# Altium PCB AP.PcbDoc (part 1 of 3)
Units mm, origin at the board's own origin, x right, y up, seen from the top; angles counter-clockwise.
Board outline 75.1 x 75.1 mm, 2 copper layers (Top Layer, Bottom Layer); 135 components, 138 nets, 746 pads, 286 vias.
Unrouted connection lines stored in the file: 9.
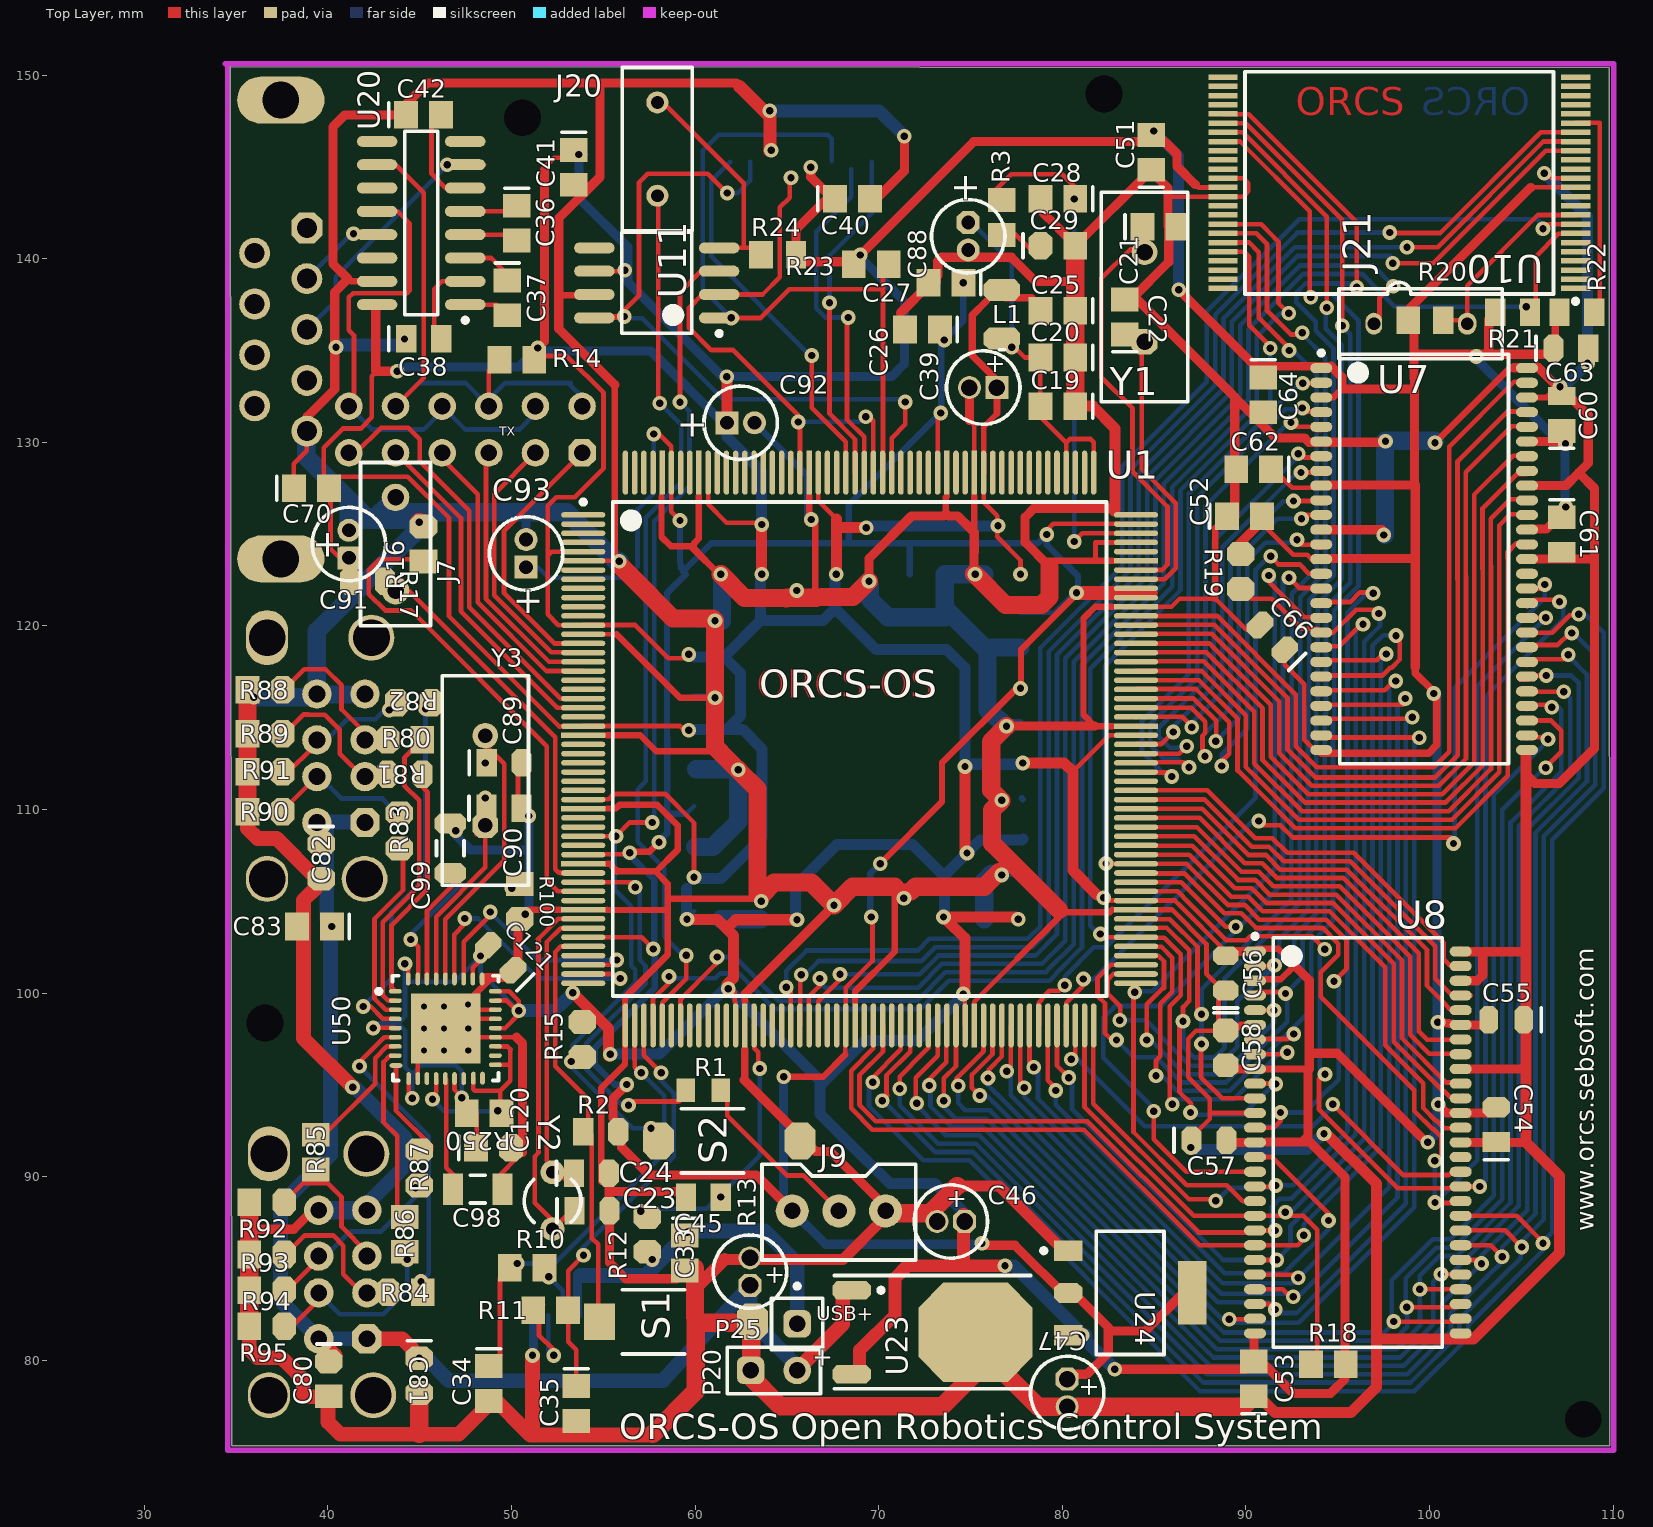
[diagram p0: Top Layer view]
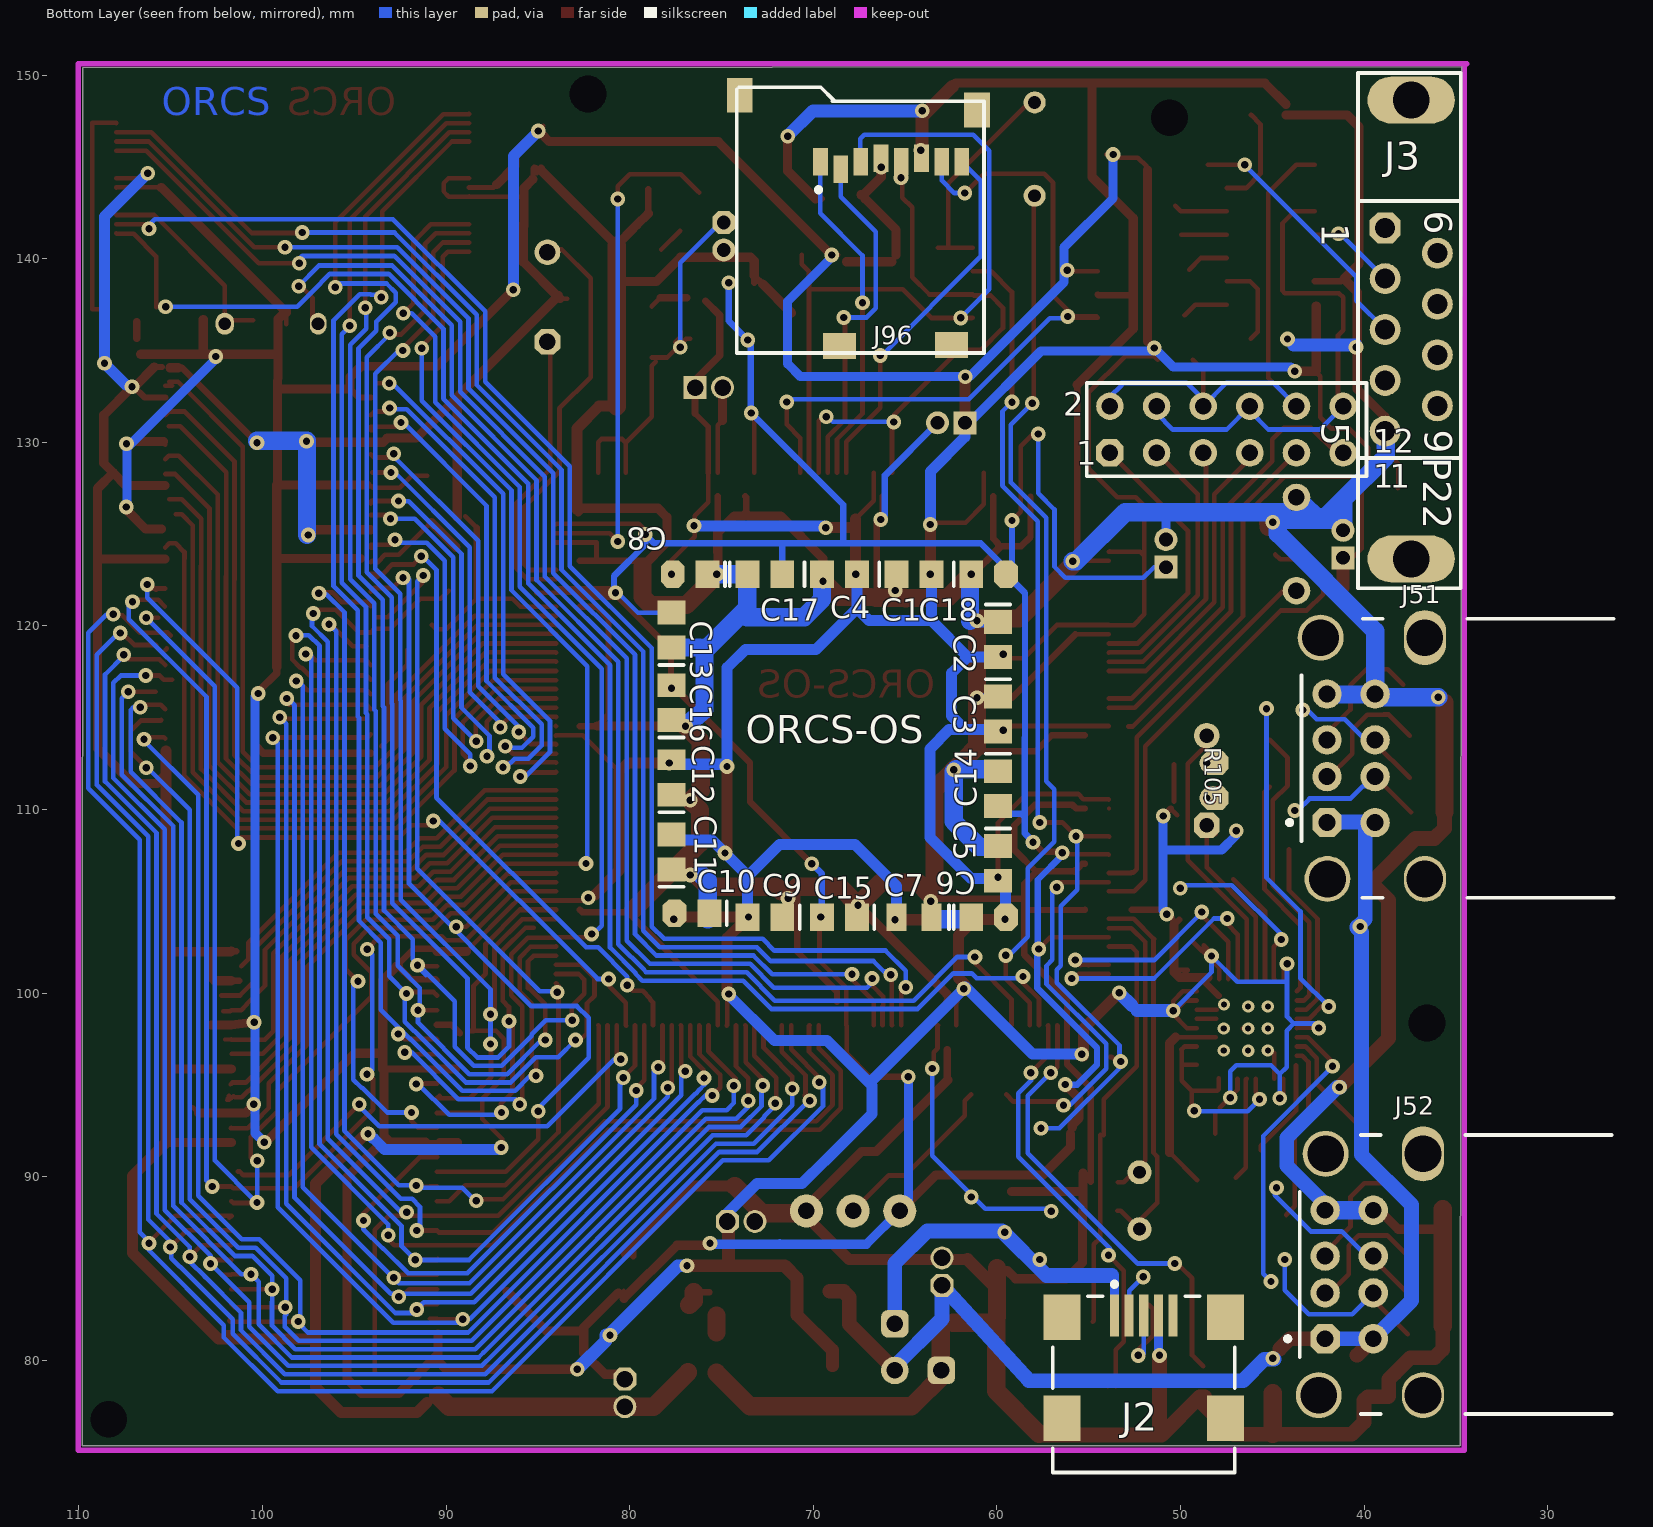
[diagram p1: Bottom Layer view, seen from below]

## Layer stack, top to bottom
Top Layer: signal copper 0.0356
Dielectric: core 0.32, FR-4, Dk 4.8
Bottom Layer: signal copper 0.0356

## Board outline
34.775,75.35 109.8,75.35 109.775,150.4 34.7,150.45

## Design rules (kind name [scope] priority, off if disabled: settings)
Clearance [All] p1: gap=0.2
FabricationTestPointUsage TestPointUsage [All] p1: valid=0 allowmultiple=FALSE
FabricationTestpoint Testpoint [All] p1: side=3 testpointundercomponent=TRUE minsize=1.016 maxsize=2.54 preferedsize=1.524 minholesize=0 maxholesize=1.016 preferedholesize=0.813 testpointgrid=0.025 allowsidetop=TRUE allowsidebottom=TRUE usegrid=TRUE gridtolerance=0
PolygonConnect [All] p1: connectstyle=Relief reliefconductorwidth=0.254 reliefentries=4 polygonreliefangle="90 Angle"
RoomDefinition AP [InComponentClass('AP')] p1: confinementstyle=ConfineIn formatcopy=TRUE lockcomponents=FALSE outline 117.802,66.795 148.79,66.795 148.79,98.037 117.802,98.037
RoutingVias [All] p1: holewidth=0.4 width=0.8 viastyle="Through Hole" minholewidth=0.4 minwidth=0.8 maxholewidth=0.4 maxwidth=0.8
SilkscreenOverComponentPads [All] p1: minsilkscreentomaskgap=0.254
SolderMaskExpansion [All] p1: expansion=0.102
Width Width_1V8 [InNet('1V8')] p1: maxlimit=0.5 minlimit=0.254 preferedwidth=0.35
Width Width_3V3 [InNet('3V3')] p2: maxlimit=0.7 minlimit=0.254 preferedwidth=0.5
Width Width_USB5V [InNet('USB5V')] p3: maxlimit=0.8 minlimit=0.254 preferedwidth=0.5
Width Width_5V [InNet('5V')] p4: maxlimit=0.8 minlimit=0.254 preferedwidth=0.5
Width Width_GND [InNet('GND')] p5: maxlimit=1 minlimit=0.25 preferedwidth=0.35
Width [All] p6: maxlimit=0.254 minlimit=0.254 preferedwidth=0.254
25 further rules are at their usual default settings.

## Components (designator, comment, footprint, x,y, rotation, side; value= is the part's Value field where it differs from the comment)
C1 "Cap" C0805#1 64.516,122.821 r180 bottom
C2 "Cap" C0805#1 59.944,119.265 r270 bottom
C3 "Cap" C0805#1 59.944,115.201 r270 bottom
C4 "Cap" C0805#1 68.58,122.821 r180 bottom
C5 "Cap" C0805#1 59.944,107.073 r270 bottom
C6 "Cap" C0805#2 60.452,104.14 r180 bottom
C7 "Cap" C0805#3 64.516,104.14 r0 bottom
C8 "Cap" C0805#2 76.708,122.821 r0 bottom
C9 "Cap" C0805#1 72.644,104.14 r0 bottom
C10 "Cap" C0805#2 76.608,104.365 r0 bottom
C11 "Cap" C0805#1 77.724,107.696 r90 bottom
C12 "Cap" C0805#4 77.724,111.76 r90 bottom
C13 "Cap" C0805#1 77.724,119.773 r90 bottom
C14 "Cap" C0805#1 59.944,111.137 r270 bottom
C15 "Cap" C0805#1 68.58,104.14 r0 bottom
C16 "Cap" C0805#1 77.724,115.824 r90 bottom
C17 "Cap" C0805#1 72.644,122.821 r180 bottom
C18 "Cap" C0805#2 60.452,122.821 r180 bottom
C19 "Cap" C0805#1 79.756,131.965 r180 top
C20 "Cap" C0805#1 79.756,134.62 r180 top
C21 "Cap" C0805#1 85.311,141.732 r0 top
C22 "Cap" C0805#1 83.412,136.827 r90 top
C23 "Cap" C0805#5 54.383,88.159 r0 top
C24 "Cap" C0805#5 54.356,90.191 r0 top
C25 "Cap" C0805#1 79.756,137.16 r180 top
C26 "Cap" C0805#1 72.386,136.144 r180 top
C27 "Cap" C0805#1 73.66,138.684 r180 top
C28 "Cap" C0805#1 79.756,143.256 r180 top
C29 "Cap" C0805#6 79.756,140.716 r0 top
C33 "Cap" C0805#1 59.436,85.852 r270 top
C34 "Cap" C0805#1 48.768,78.74 r270 top
C35 "Cap" C0805#1 53.528,77.649 r270 top
C36 "Cap" C0805#1 50.292,141.931 r270 top
C37 "Cap" C0805#1 49.784,137.867 r270 top
C38 "Cap" C0805#3 45.225,135.636 r0 top
C39 "Cap Pol1" A#1 75.692,132.981 r180 top
C40 "Cap" C0805#1 68.58,143.256 r0 top
C41 "Cap" C0805#1 53.39,144.979 r270 top
C42 "Cap" C0805#1 45.212,147.828 r0 top
C45 "Cap Pol1" A#2 62.992,84.836 r90 top
C46 "Cap Pol1" A#2 73.93,87.567 r180 top
C47 "Cap Pol1" A#2 80.264,78.232 r270 top
C51 "Cap" C0805#1 84.836,145.796 r90 top
C52 "Cap" C0805#1 89.916,125.984 r0 top
C53 "Cap" C0805#1 90.424,78.998 r90 top
C54 "Cap" C0805#5 103.632,92.839 r90 top
C55 "Cap" C0805#7 104.178,98.552 r180 top
C56 "Cap" C0805#8 88.9,101.092 r90 top
C57 "Cap" C0805#9 87.984,91.998 r0 top
C58 "Cap" C0805#10 88.9,97.028 r270 top
C60 "Cap" C0805#11 107.188,131.572 r90 top
C61 "Cap" C0805#4 107.188,124.968 r270 top
C62 "Cap" C0805#1 90.424,128.524 r180 top
C63 "Cap" C0805#12 107.696,135.128 r0 top
C64 "Cap" C0805#1 90.932,132.588 r270 top
C66 "Cap" C0805#9 91.44,119.38 r135 top
C70 "Cap" C0805#1 39.116,127.508 r0 top
C80 "Cap" C0805#6 40.041,78.998 r270 top
C81 "Cap" C0805#13 44.979,79.173 r270 top
C82 "Cap" C0805#13 39.649,107.18 r270 top
C83 "Cap" C0805#1 39.274,103.632 r180 top
C88 "Cap Pol1" A#3 74.876,141.224 r270 top
C89 "Cap" C0805#5 49.602,112.55 r0 top
C90 "Cap" C0805#3 49.593,110.06 r0 top
C91 "Cap Pol1" A#4 41.148,124.46 r90 top
C92 "Cap Pol1" A#4 62.484,131.064 r0 top
C93 "Cap Pol1" A#4 50.8,123.952 r90 top
C98 "Cap" CAPC3216L#1 48.167,89.329 r0 top
C99 "Cap" CAPC3216L#2 46.67,107.888 r90 top
C120 "Cap" C0805#2 49.026,91.572 r0 top
C121 "Cap" C0805#9 49.416,101.932 r135 top
J2 "440119-2" 440247 52.004,74.601 r270 bottom
J3 "D Connector 9" DSUB1.385-2H9 27.94,136.144 r270 bottom
J7 "Jumper" RAD-0.2#1 43.688,124.46 r90 top
J9 "SW-SPDT" TL36WW15050 70.374,88.142 r0 top
J20 "Jumper" RAD-0.2#2 57.946,145.971 r90 top
J21 "Jumper" RAD-0.2#3 99.51,136.46 r0 top
J51 "1-1470168-1" 1470168#1 26.416,112.793 r180 bottom
J52 "1-1470168-1" 1470168#2 26.516,84.68 r180 bottom
J96 "SDAMB-01201BT00_MINISD" SDAMB-012_miniSD 62.61,138.801 r180 bottom
L1 "Inductor" 0402-A 76.708,136.144 r90 top
P20 "Header 2" HDR1X2 63.021,79.456 r0 top
P22 "Header 6X2" HDR2X6 53.848,129.425 r180 bottom
P25 "Plug" PIN1 65.561,81.996 r0 top
R1 "Res2" 2012[0805]#1 60.452,94.713 r180 top
R2 "Res2" 2012[0805]#2 54.864,92.456 r0 top
R3 "Res" 2012[0805]#3 76.708,142.24 r270 top
R10 "Res" 2012[0805]#3 50.86,85.061 r0 top
R11 "Res" 2012[0805]#3 52.137,82.729 r180 top
R12 "Res" 2012[0805]#4 57.404,86.868 r270 top
R13 "Res" 2012[0805]#5 60.452,88.9 r180 top
R14 "Res" 2012[0805]#3 50.292,134.505 r0 top
R15 "Res" 2012[0805]#4 53.848,97.478 r270 top
R16 "Res" 2012[0805]#6 45.212,124.46 r270 top
R17 "Res" 2012[0805]#7 42.164,122.428 r0 top
R18 "Res" 2012[0805]#3 94.488,79.781 r180 top
R19 "Res" 2012[0805]#4 89.708,122.961 r270 top
R20 "Res" 2012[0805]#8 99.793,136.652 r180 top
R21 "Res" 2012[0805]#5 104.523,137.085 r180 top
R22 "Res" 2012[0805]#5 108.021,137.085 r0 top
R23 "Res" 2012[0805]#3 69.596,139.7 r180 top
R24 "Res" 2012[0805]#8 64.543,140.208 r180 top
R80 "Res" 2012[0805]#9 44.196,113.792 r180 top
R81 "Res" 2012[0805]#7 44.196,111.927 r180 top
R82 "Res" 2012[0805]#4 44.704,115.824 r180 top
R83 "Res" 2012[0805]#4 43.896,108.837 r90 top
R84 "Res" 2012[0805]#9 44.221,83.72 r180 top
R85 "Res" 2012[0805]#3 39.349,91.34 r270 top
R86 "Res" 2012[0805]#3 44.196,86.868 r270 top
R87 "Res" 2012[0805]#4 44.987,90.474 r270 top
R88 "Res" 2012[0805]#6 36.576,116.532 r180 top
R89 "Res" 2012[0805]#9 36.576,114.134 r0 top
R90 "Res" 2012[0805]#6 36.576,109.887 r180 top
R91 "Res" 2012[0805]#6 36.576,112.052 r180 top
R92 "Res" 2012[0805]#6 36.676,88.619 r180 top
R93 "Res" 2012[0805]#6 36.676,85.771 r180 top
R94 "Res" 2012[0805]#9 36.676,83.814 r0 top
R95 "Res" 2012[0805]#9 36.676,81.874 r0 top
R100 "Res" 2012[0805]#9 50.442,104.987 r270 top
R105 "Res" 2012[0805]#4 48.135,111.585 r90 bottom
R250 "Res" 2012[0805]#3 48.518,93.472 r180 top
S1 "KSS221GLFS" KSS-2G#1 57.741,82.106 r0 top
S2 "KSS221GLFS" KSS-2G#2 60.96,91.957 r180 top
U1 "AT91SAM9260-CI-002" QFP208_M 68.961,113.296 r0 top
U7 "MT48LC16M16A2P-75" TSOP2-54_L 93.86,117.8 r0 top
U8 "MT48LC16M16A2P-75" TSOP2-54_L 90.254,86.034 r0 top
U10 "M29F400B90N1R" TSOP48 98.353,144.131 r90 top
U11 "AT45" SO8W_N 57.912,138.684 r180 top
U20 "MAX3232ESE" NSO16_N 45.085,141.943 r180 top
U23 "LF33CDT" TO-252 71.898,81.538 r270 top
U24 "REG1117-1.8" ZZ311 83.69,83.678 r270 top
U50 "USB2514" QFN36_L 46.125,98.35 r0 top
Y1 "18.432Mhz" HC-49U#1 84.478,137.911 r90 top
Y2 "32.768kHz" R38 52.241,88.7 r0 top
Y3 "24Mhz" HC-49U#2 48.577,111.584 r90 top

## Footprints (in the part's own frame and the unit in brackets; to place one, negate y for a bottom-side part, rotate by r counter-clockwise, add the part's x,y. Pads: shape width x height; smd on the part's side, far side on the other; paste and mask are expansions set on the pad)
0402-A [mm] "Chip Inductor; Body 1 x 0.5 mm (LxW typ)"
  oct 1.2x2 smd: 1(-0.5,0) 2(2.156,0)
  silkscreen extent -1.1,-0.15 -1.1,0.15
2012[0805]#1 [mm] "Chip Resistor; Body 2.0 x 1.3 mm (LxW typ)"
  rect 1x1.3 smd: 1(-0.95,0) 2(0.95,0)
2012[0805]#2 [mm] "Chip Resistor; Body 2.0 x 1.3 mm (LxW typ)"
  rect 1.1x1.5 smd: 1(-0.95,0)
  oct 1.1x1.5 smd: 2(0.95,0)
2012[0805]#3 [mm] "Chip Resistor; Body 2.0 x 1.3 mm (LxW typ)"
  rect 1.3x1.5 smd: 1(-0.95,0) 2(0.95,0)
2012[0805]#4 [mm] "Chip Resistor; Body 2.0 x 1.3 mm (LxW typ)"
  oct 1.3x1.5 smd: 1(-0.95,0) 2(0.95,0)
2012[0805]#5 [mm] "Chip Resistor; Body 2.0 x 1.3 mm (LxW typ)"
  rect 1.1x1.5 smd: 1(-0.95,0) 2(0.95,0)
2012[0805]#6 [mm] "Chip Resistor; Body 2.0 x 1.3 mm (LxW typ)"
  oct 1.3x1.5 smd: 1(-0.95,0)
  rect 1.3x1.5 smd: 2(0.95,0)
2012[0805]#7 [mm] "Chip Resistor; Body 2.0 x 1.3 mm (LxW typ)"
  oct 1.1x1.5 smd: 1(-0.95,0) 2(0.95,0)
2012[0805]#8 [mm] "Chip Resistor; Body 2.0 x 1.3 mm (LxW typ)"
  rect 1.1x1.5 smd: 1(-0.95,0)
  rect 1.3x1.5 smd: 2(0.95,0)
2012[0805]#9 [mm] "Chip Resistor; Body 2.0 x 1.3 mm (LxW typ)"
  rect 1.3x1.5 smd: 1(-0.95,0)
  oct 1.3x1.5 smd: 2(0.95,0)
440247 [mm] "Connector; USB2.0, Type B, SM; 5 Position; Right Angle"
  rect 2.3x0.5 smd: 1(-7.85,-1.6) 2(-7.85,-0.8) 3(-7.85,0) 4(-7.85,0.8) 5(-7.85,1.6)
  rect 2.5x2 smd: 6(-7.75,4.45) 7(-2.25,4.45) 8(-7.75,-4.45) 9(-2.25,-4.45)
  round 0 all layers, no hole: MH1(-5.25,2.2) MH2(-5.25,-2.2)
  silkscreen extent -9.67,-4.95 0.7,4.95
1470168#1 [mm] "Connector; USB1.1, Type A, Thru-Hole; 4x4 Position; Right Angle"
  oct 1.6x1.6 hole 0.92: 1(-15.61,-3.5)
  round 1.6 hole 0.92: 2(-15.61,-1) 3(-15.61,1) 4(-15.61,3.5) 5(-12.99,-3.5) 6(-12.99,-1) 7(-12.99,1) 8(-12.99,3.5)
  oval 2.3x3 hole 2: 9(-10.28,6.57)
  oval 2.3x2.5 hole 2: 10(-10.28,-6.57)
  round 2.5 hole 2: 11(-15.96,6.57) 12(-15.584,-6.57)
  silkscreen extent -17.78,-7.6 0,7.6
1470168#2 [mm] "Connector; USB1.1, Type A, Thru-Hole; 4x4 Position; Right Angle"
  oct 1.6x1.6 hole 0.92: 1(-15.61,-3.5)
  round 1.6 hole 0.92: 2(-15.61,-1) 3(-15.61,1) 4(-15.61,3.5) 5(-12.99,-3.5) 6(-12.99,-1) 7(-12.99,1) 8(-12.99,3.5)
  oval 2.3x3 hole 2: 9(-10.28,6.57)
  oval 2.3x2.5 hole 2: 10(-10.28,-6.57)
  round 2.5 hole 2: 11(-15.584,6.57) 12(-15.96,-6.57)
  silkscreen extent -17.78,-7.6 0,7.6
A#1 [mm] "Capacitor, Electrolytic, Radial; Body 4 x 5 mm (Dia.xH typ); Pin Spacing 1.5 mm (typ)"
  rect 1.25x1.25 hole 0.9: 1(-0.75,0)
  round 1.25 hole 0.9: 2(0.75,0)
  silkscreen extent -2,-2 2,2
A#2 [mm] "Capacitor, Electrolytic, Radial; Body 4 x 5 mm (Dia.xH typ); Pin Spacing 1.5 mm (typ)"
  oct 1.25x1.25 hole 0.9: 1(-0.75,0)
  round 1.25 hole 0.9: 2(0.75,0)
  silkscreen extent -2,-2 2,2
A#3 [mm] "Capacitor, Electrolytic, Radial; Body 4 x 5 mm (Dia.xH typ); Pin Spacing 1.5 mm (typ)"
  oct 1.25x1.25 hole 0.75: 1(-0.75,0)
  round 1.25 hole 0.75: 2(0.75,0)
  silkscreen extent -2,-2 2,2
A#4 [mm] "Capacitor, Electrolytic, Radial; Body 4 x 5 mm (Dia.xH typ); Pin Spacing 1.5 mm (typ)"
  rect 1.25x1.25 hole 0.75: 1(-0.75,0)
  round 1.25 hole 0.75: 2(0.75,0)
  silkscreen extent -2,-2 2,2
C0805#1 [mm] "Chip Capacitor; Body 2.0 x 1.2 mm (LxW typ)"
  rect 1.3x1.5 smd: 1(-0.95,0) 2(0.95,0)
  silkscreen extent -1.9,-0.65 -1.9,0.65
C0805#2 [mm] "Chip Capacitor; Body 2.0 x 1.2 mm (LxW typ)"
  rect 1.3x1.5 smd: 1(-0.95,0)
  oct 1.3x1.5 smd: 2(0.95,0)
  silkscreen extent -1.9,-0.65 -1.9,0.65
C0805#3 [mm] "Chip Capacitor; Body 2.0 x 1.2 mm (LxW typ)"
  rect 1.1x1.5 smd: 1(-0.95,0) 2(0.95,0)
  silkscreen extent -1.9,-0.65 -1.9,0.65
C0805#4 [mm] "Chip Capacitor; Body 2.0 x 1.2 mm (LxW typ)"
  rect 1.3x1.5 smd: 1(-0.95,0)
  rect 1.1x1.5 smd: 2(0.95,0)
  silkscreen extent -1.9,-0.65 -1.9,0.65
C0805#5 [mm] "Chip Capacitor; Body 2.0 x 1.2 mm (LxW typ)"
  rect 1.1x1.5 smd: 1(-0.95,0)
  oct 1.1x1.5 smd: 2(0.95,0)
  silkscreen extent -1.9,-0.65 -1.9,0.65
C0805#6 [mm] "Chip Capacitor; Body 2.0 x 1.2 mm (LxW typ)"
  oct 1.3x1.5 smd: 1(-0.95,0)
  rect 1.3x1.5 smd: 2(0.95,0)
  silkscreen extent -1.9,-0.65 -1.9,0.65
C0805#7 [mm] "Chip Capacitor; Body 2.0 x 1.2 mm (LxW typ)"
  oct 1x1.5 smd: 1(-0.95,0) 2(0.95,0)
  silkscreen extent -1.9,-0.65 -1.9,0.65
C0805#8 [mm] "Chip Capacitor; Body 2.0 x 1.2 mm (LxW typ)"
  oct 1.1x1.4 smd: 1(-0.95,0)
  oct 1x1.4 smd: 2(0.95,0)
  silkscreen extent -1.9,-0.65 -1.9,0.65
C0805#9 [mm] "Chip Capacitor; Body 2.0 x 1.2 mm (LxW typ)"
  oct 1.1x1.5 smd: 1(-0.95,0) 2(0.95,0)
  silkscreen extent -1.9,-0.65 -1.9,0.65
C0805#10 [mm] "Chip Capacitor; Body 2.0 x 1.2 mm (LxW typ)"
  oct 1.3x1.4 smd: 1(-0.95,0) 2(0.95,0)
  silkscreen extent -1.9,-0.65 -1.9,0.65
C0805#11 [mm] "Chip Capacitor; Body 2.0 x 1.2 mm (LxW typ)"
  rect 1.3x1.5 smd: 1(-0.95,0)
  rect 1x1.5 smd: 2(0.95,0)
  silkscreen extent -1.9,-0.65 -1.9,0.65
C0805#12 [mm] "Chip Capacitor; Body 2.0 x 1.2 mm (LxW typ)"
  oct 1.1x1.5 smd: 1(-0.95,0)
  rect 1.1x1.5 smd: 2(0.95,0)
  silkscreen extent -1.9,-0.65 -1.9,0.65
C0805#13 [mm] "Chip Capacitor; Body 2.0 x 1.2 mm (LxW typ)"
  oct 1.3x1.5 smd: 1(-0.95,0) 2(0.95,0)
  silkscreen extent -1.9,-0.65 -1.9,0.65
CAPC3216L#1 [mm] "Chip Capacitor, Body 3.2x1.6mm, IPC High Density"
  rect 1.1x1.7 smd: 1(-1.35,0) 2(1.35,0)
  silkscreen extent -0.4,-0.75 0.4,0.75, body extent -1.7,-0.9 1.7,0.9, height 1.3
CAPC3216L#2 [mm] "Chip Capacitor, Body 3.2x1.6mm, IPC High Density"
  oct 1.1x1.7 smd: 1(-1.35,0) 2(1.35,0)
  silkscreen extent -0.4,-0.75 0.4,0.75, body extent -1.7,-0.9 1.7,0.9, height 1.3
DSUB1.385-2H9 [mm] "Connector; D Subminiature; 9 Position; Right Angle; Pitch 1.385 mm"
  oct 1.69x1.69 hole 1.09: 1(-5.54,-10.92)
  round 1.69 hole 1.09: 2(-2.77,-10.92) 3(0,-10.92) 4(2.77,-10.92) 5(5.54,-10.92) 6(-4.155,-8.08) 7(-1.385,-8.08) 8(1.385,-8.08) 9(4.155,-8.08)
  oval 2.55x4.76 hole 2: 10(-12.495,-9.5) 11(12.495,-9.5)
  silkscreen extent -13.97,-12.4 14.1,-6.81
HC-49U#1 [mm] "Quartz Crystal, Thru-Hole; 2 Leads; Body 11.35 x 4.65 x 13.46 mm (LxWxH max)"
  oct 1.4x1.4 hole 0.9: 1(-2.44,0)
  round 1.4 hole 0.9: 2(2.44,0)
  silkscreen extent -5.7,-2.35 5.7,2.35
HC-49U#2 [mm] "Quartz Crystal, Thru-Hole; 2 Leads; Body 11.35 x 4.65 x 13.46 mm (LxWxH max)"
  oct 1.4x1.4 hole 0.8: 1(-2.44,0)
  round 1.4 hole 0.8: 2(2.44,0)
  silkscreen extent -5.7,-2.35 5.7,2.35
HDR1X2 [mm] "Connector; Header; 2 Position"
  rrect50% 1.5x1.5 hole 0.9: 1(0,0)
  round 1.5 hole 0.9: 2(2.54,0)
  silkscreen extent -1.27,-1.27 3.81,1.27
HDR2X6 [mm] "Connector; Header; 6x2 Position"
  oct 1.5x1.5 hole 0.9: 1(0,0)
  round 1.5 hole 0.9: 2(0,2.54) 3(2.54,0) 4(2.54,2.54) 5(5.08,0) 6(5.08,2.54) 7(7.62,0) 8(7.62,2.54) 9(10.16,0) 10(10.16,2.54) 11(12.7,0) 12(12.7,2.54)
  silkscreen extent -1.27,-1.27 13.97,3.81
KSS-2G#1 [mm] "Switch, Side Tact, SM; 2 Leads; Body 7x3.5mm (LxW)"
  oct 1.7x2 smd: 1(5.384,0)
  rect 1.7x2 smd: 2(-2.95,0)
  silkscreen extent -1.7,-1.75 1.7,1.75, body extent -2.75,-2.65 2.75,1.75, height 1.75
KSS-2G#2 [mm] "Switch, Side Tact, SM; 2 Leads; Body 7x3.5mm (LxW)"
  oct 1.7x2 smd: 1(2.95,0) 2(-4.752,0)
  silkscreen extent -1.7,-1.75 1.7,1.75, body extent -2.75,-2.65 2.75,1.75, height 1.75
NSO16_N [mm] "SOIC, 16-Leads, Body 9.9x3.9mm, Pitch 1.27mm, IPC Medium Density"
  oval 2.2x0.6 smd: 1(-2.4,4.445) 2(-2.4,3.175) 3(-2.4,1.905) 4(-2.4,0.635) 5(-2.4,-0.635) 6(-2.4,-1.905) 7(-2.4,-3.175) 8(-2.4,-4.445) 9(2.4,-4.445) 10(2.4,-3.175) 11(2.4,-1.905) 12(2.4,-0.635) 13(2.4,0.635) 14(2.4,1.905) 15(2.4,3.175) 16(2.4,4.445)
  silkscreen extent -2.53,-5 0.9,5.42, body extent -1.95,-4.95 1.95,4.95, height 1.75
PIN1 [mm] "Connector; Plug"
  rrect50% 1.5x1.5 hole 0.9: 1(0,0)
  silkscreen extent -1.4,-1.4 1.4,2.17
QFN36_L [mm] "QFN, 36-Leads, Body 6x6mm, Pitch 0.5mm, IPC High Density"
  oval 0.7x0.25 smd: 1(-2.45,1.75) 2(-2.45,1.25) 3(-2.45,0.75) 4(-2.45,0.25) 5(-2.45,-0.25) 6(-2.45,-0.75) 7(-2.45,-1.25) 8(-2.45,-1.75) 9(-2.413,-2.286) 19(3,-2.25) 20(3,-1.75) 21(3,-1.25) 22(3,-0.75) 23(3,-0.25) 24(3,0.25) 25(3,0.75) 26(3,1.25) 27(3,1.75)
  oval 0.25x0.7 smd: 10(-1.725,-3) 11(-1.225,-3) 12(-0.725,-3) 13(-0.225,-3) 14(0.275,-3) 15(0.775,-3) 16(1.275,-3) 17(1.8,-2.975) 18(2.3,-2.975) 28(2.275,2.425) 29(1.775,2.425) 30(1.275,2.425) 31(0.775,2.425) 32(0.275,2.425) 33(-0.225,2.425) 34(-0.725,2.425) 35(-1.225,2.425) 36(-1.75,2.425)
  rect 3.8x3.8 smd: 33(0.3,-0.275)
  silkscreen extent -3.47,-3.1 3.17,2.6, body extent -2.6,-3.09 3.12,2.59, height 0.8
QFP208_M [mm] "Shrink QFP, 208-Leads, Body 28x28mm, Pitch 0.5mm, IPC Low Density"
  oval 2.4x0.3 smd: 1(-15.05,12.75) 2(-15.05,12.25) 3(-15.05,11.75) 4(-15.05,11.25) 5(-15.05,10.75) 6(-15.05,10.25) 7(-15.05,9.75) 8(-15.05,9.25) 9(-15.05,8.75) 10(-15.05,8.25) 11(-15.05,7.75) 12(-15.05,7.25) 13(-15.05,6.75) 14(-15.05,6.25) 15(-15.05,5.75) 16(-15.05,5.25) 17(-15.05,4.75) 18(-15.05,4.25) 19(-15.05,3.75) 20(-15.05,3.25) 21(-15.05,2.75) 22(-15.05,2.25) 23(-15.05,1.75) 24(-15.05,1.25) 26(-15.05,0.25) 27(-15.05,-0.25) 28(-15.05,-0.75) 29(-15.05,-1.25) 30(-15.05,-1.75) 31(-15.05,-2.25) 32(-15.05,-2.75) 34(-15.05,-3.75) 35(-15.05,-4.25) 36(-15.05,-4.75) 37(-15.05,-5.25) 38(-15.05,-5.75) 40(-15.05,-6.75) 41(-15.05,-7.25) 42(-15.05,-7.75) 43(-15.05,-8.25) 45(-15.05,-9.25) 46(-15.05,-9.75) 47(-15.05,-10.25) 48(-15.05,-10.75) 49(-15.05,-11.25) 50(-15.05,-11.75) 51(-15.05,-12.25) 52(-15.05,-12.75) 105(15.05,-12.75) 106(15.05,-12.25) 107(15.05,-11.75) 108(15.05,-11.25) 109(15.05,-10.75) 110(15.05,-10.25) 111(15.05,-9.75) 112(15.05,-9.25) 114(15.05,-8.25) 115(15.05,-7.75) 116(15.05,-7.25) 117(15.05,-6.75) 118(15.05,-6.25) 119(15.05,-5.75) 120(15.05,-5.25) 121(15.05,-4.75) 122(15.05,-4.25) 123(15.05,-3.75) 124(15.05,-3.25) 125(15.05,-2.75) 126(15.05,-2.25) 127(15.05,-1.75) 128(15.05,-1.25) 129(15.05,-0.75) 130(15.05,-0.25) 131(15.05,0.25) 132(15.05,0.75) 134(15.05,1.75) 135(15.05,2.25) 136(15.05,2.75) 137(15.05,3.25) 138(15.05,3.75) 139(15.05,4.25) 140(15.05,4.75) 141(15.05,5.25) 142(15.05,5.75) 143(15.05,6.25) 144(15.05,6.75) 145(15.05,7.25) 147(15.05,8.25) 148(15.05,8.75) 149(15.05,9.25) 150(15.05,9.75) 152(15.05,10.75) 153(15.05,11.25) 154(15.05,11.75) 155(15.05,12.25) 156(15.05,12.75)
  rect 2.4x0.3 smd: 25(-15.05,0.75) 33(-15.05,-3.25) 39(-15.05,-6.25) 44(-15.05,-8.75) 113(15.05,-8.75) 133(15.05,1.25) 146(15.05,7.75) 151(15.05,10.25)
  oval 0.3x2.4 smd: 53(-12.75,-15.05) 54(-12.25,-15.05) 55(-11.75,-15.05) 56(-11.25,-15.05) 57(-10.75,-15.05) 58(-10.25,-15.05) 59(-9.75,-15.05) 60(-9.25,-15.05) 61(-8.75,-15.05) 62(-8.25,-15.05) 63(-7.75,-15.05) 64(-7.25,-15.05) 65(-6.75,-15.05) 67(-5.75,-15.05) 68(-5.25,-15.05) 69(-4.75,-15.05) 70(-4.25,-15.05) 71(-3.75,-15.05) 72(-3.25,-15.05) 73(-2.75,-15.05) 74(-2.25,-15.05) 75(-1.75,-15.05) 76(-1.25,-15.05) 77(-0.75,-15.05) 79(0.25,-15.05) 80(0.75,-15.05) 81(1.25,-15.05) 82(1.75,-15.05) 83(2.25,-15.05) 84(2.75,-15.05) 85(3.25,-15.05) 86(3.75,-15.05) 87(4.25,-15.05) 88(4.75,-15.05) 89(5.25,-15.05) 90(5.75,-15.05) 92(6.75,-15.05) 93(7.25,-15.05) 94(7.75,-15.05) 95(8.25,-15.05) 96(8.75,-15.05) 97(9.25,-15.05) 98(9.75,-15.05) 99(10.25,-15.05) 100(10.75,-15.05) 101(11.25,-15.05) 102(11.75,-15.05) 103(12.25,-15.05) 104(12.75,-15.05) 157(12.75,15.05) 158(12.25,15.05) 159(11.75,15.05) 160(11.25,15.05) 161(10.75,15.05) 162(10.25,15.05) 163(9.75,15.05) 164(9.25,15.05) 165(8.75,15.05) 166(8.25,15.05) 167(7.75,15.05) 168(7.25,15.05) 169(6.75,15.05) 171(5.75,15.05) 172(5.25,15.05) 174(4.25,15.05) 175(3.75,15.05) 176(3.25,15.05) 177(2.75,15.05) 178(2.25,15.05) 179(1.75,15.05) 180(1.25,15.05) 181(0.75,15.05) 182(0.25,15.05) 183(-0.25,15.05) 184(-0.75,15.05) 185(-1.25,15.05) 186(-1.75,15.05) 187(-2.25,15.05) 189(-3.25,15.05) 190(-3.75,15.05) 191(-4.25,15.05) 192(-4.75,15.05) 193(-5.25,15.05) 194(-5.75,15.05) 195(-6.25,15.05) 196(-6.75,15.05) 197(-7.25,15.05) 198(-7.75,15.05) 199(-8.25,15.05) 201(-9.25,15.05) 202(-9.75,15.05) 203(-10.25,15.05) 205(-11.25,15.05) 206(-11.75,15.05) 207(-12.25,15.05) 208(-12.75,15.05)
  rect 0.3x2.4 smd: 66(-6.25,-15.05) 78(-0.25,-15.05) 91(6.25,-15.05) 170(6.25,15.05) 173(4.75,15.05) 188(-2.75,15.05) 200(-8.75,15.05) 204(-10.75,15.05)
  silkscreen extent -15.17,-13.45 13.45,13.57, body extent -14,-14 14,14, height 4.3
R38 [mm] "Crystal, Thru-Hole; 2 Leads; Body 3.1 x 8.2 mm (Dia.xH)"
  round 1.3 hole 0.7: 1(0,1.55) 2(0,-1.55)
  silkscreen extent -1.55,-1.19 1.55,1.17
RAD-0.2#1 [mm] "Jumper Wire; 2 Leads"
  round 1.5 hole 0.9: 1(-2.54,0) 2(2.54,0)
  silkscreen extent -4.45,-1.91 4.44,1.91
RAD-0.2#2 [mm] "Jumper Wire; 2 Leads"
  round 1.2 hole 0.7: 1(-2.54,0) 2(2.54,0)
  silkscreen extent -4.44,-1.91 4.44,1.91
RAD-0.2#3 [mm] "Jumper Wire; 2 Leads"
  oval 0.9x1.2 hole 0.7: 1(-2.54,0)
  oval 1x1.2 hole 0.7: 2(2.54,0)
  silkscreen extent -4.44,-1.91 4.44,1.91
SDAMB-012_miniSD [mm] "Connector; SD Card Type A, SM, 9 Position, Right Angle, Pitch 2.5 mm, Body 23.3 x 27.4 x 3.4 mm (LxWxH)"
  rect 0.8x1.5 smd: 1(-7,6.477) 2(-5.9,6.077) 3(-4.8,6.477) 4(-3.7,6.677) 5(-2.6,6.477) 6(-1.5,6.677) 7(-0.4,6.477) 8(0.7,6.477)
  rect 1.4x1.9 smd: MH1(1.524,9.3) MH2(-11.4,10.1)
  rect 1.8x1.4 smd: SW2(-5.969,-3.556) SW3(0.127,-3.5)
  silkscreen extent -11.56,-3.94 1.91,10.54
SO8W_N [mm] "SOP, 8-Leads, Body 5.3x5.3mm, Pitch 1.27mm, IPC Medium Density"
  oval 2.2x0.6 smd: 1(-3.4,1.905) 2(-3.4,0.635) 3(-3.4,-0.635) 4(-3.4,-1.905) 5(3.4,-1.905) 6(3.4,-0.635) 7(3.4,0.635) 8(3.4,1.905)
  silkscreen extent -3.52,-2.75 1.9,2.88, body extent -2.73,-2.75 2.73,2.75, height 2.13
TL36WW15050 [mm] "SPDT Subminiature Toggle Switch, Right Angle Mounting, Vertical Actuation"
  round 1.8 hole 0.9: 1(0,0) 2(-2.54,0) 3(-5.08,0)
  silkscreen extent -6.73,-2.67 1.65,2.54
TO-252 [mm] "D-PAK/TO-252-AA; 3 Leads (1 Cropped); Body 10.1 (inc. leads) x 6.6 mm (LxW max)"
  oct 1x2.1 smd: 1(-2.285,-3.375) 3(2.285,-3.375)
  oct 5.4x6.2 smd: 4(0,3.375)
  silkscreen extent -3.08,-4.33 3.08,6.37
TSOP2-54_L [mm] "SOP, 54-Leads, Body 22.2x10.16mm, Pitch 0.8mm, IPC High Density"
  oval 1.2x0.55 smd: 1(0.242,16.242) 2(0.242,15.442) 3(0.242,14.642) 4(0.242,13.842) 5(0.242,13.042) 6(0.242,12.242) 7(0.242,11.442) 8(0.242,10.642) 9(0.242,9.842) 10(0.242,9.042) 11(0.242,8.242) 12(0.242,7.442) 13(0.242,6.642) 14(0.242,5.842) 15(0.242,5.042) 16(0.242,4.242) 17(0.242,3.442) 18(0.242,2.642) 19(0.242,1.842) 20(0.242,1.042) 21(0.242,0.242) 22(0.242,-0.558) 23(0.242,-1.358) 24(0.242,-2.158) 25(0.242,-2.958) 26(0.242,-3.758) 27(0.242,-4.558) 28(11.442,-4.558) 29(11.442,-3.758) 30(11.442,-2.958) 31(11.442,-2.158) 32(11.442,-1.358) 33(11.442,-0.558) 34(11.442,0.242) 35(11.442,1.042) 36(11.442,1.842) 37(11.442,2.642) 38(11.442,3.442) 39(11.442,4.242) 40(11.442,5.042) 41(11.442,5.842) 42(11.442,6.642) 43(11.442,7.442) 44(11.442,8.242) 45(11.442,9.042) 46(11.442,9.842) 47(11.442,10.642) 48(11.442,11.442) 49(11.442,12.242) 50(11.442,13.042) 51(11.442,13.842) 52(11.442,14.642) 53(11.442,15.442) 54(11.442,16.242)
  silkscreen extent 0.12,-5.31 10.44,17.19, body extent 0.72,-5.31 10.96,16.99, height 1.2
TSOP48 [mm] "Shrink Small Outline, Plastic, Thin; 48 Leads; Body Width 18.4 mm; Pitch 0.5 mm"
  rect 0.3x1.6 smd: 1(-5.75,-9.6) 2(-5.25,-9.6) 3(-4.75,-9.6) 4(-4.25,-9.6) 5(-3.75,-9.6) 6(-3.25,-9.6) 7(-2.75,-9.6) 8(-2.25,-9.6) 9(-1.75,-9.6) 10(-1.25,-9.6) 11(-0.75,-9.6) 12(-0.25,-9.6) 13(0.25,-9.6) 14(0.75,-9.6) 15(1.25,-9.6) 16(1.75,-9.6) 17(2.25,-9.6) 18(2.75,-9.6) 19(3.25,-9.6) 20(3.75,-9.6) 21(4.25,-9.6) 22(4.75,-9.6) 23(5.25,-9.6) 24(5.75,-9.6) 25(5.75,9.6) 26(5.25,9.6) 27(4.75,9.6) 28(4.25,9.6) 29(3.75,9.6) 30(3.25,9.6) 31(2.75,9.6) 32(2.25,9.6) 33(1.75,9.6) 34(1.25,9.6) 35(0.75,9.6) 36(0.25,9.6) 37(-0.25,9.6) 38(-0.75,9.6) 39(-1.25,9.6) 40(-1.75,9.6) 41(-2.25,9.6) 42(-2.75,9.6) 43(-3.25,9.6) 44(-3.75,9.6) 45(-4.25,9.6) 46(-4.75,9.6) 47(-5.25,9.6) 48(-5.75,9.6)
  silkscreen extent -6.57,-9.73 6.05,8.4
ZZ311 [mm] "SOT-223/SC-73; 4 Leads; Body 6.7 x 7.3 mm, inc. leads (LxW max)"
  rect 1.1x1.55 smd: 1(-2.3,-3.375) 3(2.3,-3.375)
  oct 1.1x1.55 smd: 2(0,-3.375)
  rect 3.45x1.55 smd: 4(0,3.375)
  silkscreen extent -3.35,-4.82 3.35,1.85

## Part data
C1 C2 C3 C4 C5 C6 C7 C8 C9 C10 C11 C12 C13 C14 C15 C16 C17 C18 C19 C20 C21 C22 C23 C24 C25 C26 C27 C28 C29 C33 C34 C35 C36 C37 C38 C40 C41 C42 C51 C52 C53 C54 C55 C56 C57 C58 C60 C61 C62 C63 C64 C66 C70 C80 C81 C82 C83 C89 C90 C98 C99 C120 C121: library part "Cap Semi", "Capacitor (Semiconductor SIM Model)"
C39 C45 C46 C47 C88 C91 C92 C93: "Polarized Capacitor (Radial)"
J2: "USB 1.1, Right Angle, Thru-Hole, B Type, Receptacle, 4 Position, Black"
J3: "Receptacle Assembly, 9 Position, Right Angle"
J7 J20 J21: "Jumper Wire"
J9: "SPDT Subminiature Toggle Switch, Right Angle Mounting, Vertical Actuation"
J51 J52: "USB 1.1, Right Angle, Thru-Hole, A Type, Receptacle, 4x4 Position, Stacked, Black"
J96: "Secure Digital Card Connector, Type A without Cover; Surface Mount; 9-Position, 1u\" Au Plating"
P20: "Header, 2-Pin"
P22: "Header, 6-Pin, Dual row"
R1 R2: "Resistor"
R3 R10 R11 R12 R13 R14 R15 R16 R17 R18 R19 R20 R21 R22 R23 R24 R80 R81 R82 R83 R84 R85 R86 R87 R88 R89 R90 R91 R92 R93 R94 R95 R100 R105 R250: library part Res2, "Resistor"
S1 S2: "Switch, Subminiature Side-Actuated Tact, SMT, KSS Series, Std Actuator, 2 Gull Wing Leads, SPST, 2N Force, Silver Contact"
U1: library part AT91RM9200-CI-002, "16-Bit ARM Microcontroller, ARM9TDMI 32-bit RISC CPU, 16KB Instruction and 16KB Data caches, 256-Ball BGA, Industrial"
U7 U8: "256Mb Synchronous High-Speed CMOS DRAM, 16Mb x 16Bit x 4 Banks, 54-Pin TSOP Pb-free, Commercial"
U10: "4 Mbit (512Kb x8 or 256Kb x16, Boot Block) Single Supply Flash Memory"
U11: "16Mbit Serial I²C Bus SERIAL FLASH"
U20: "3.0V TO 5.5V, Low-Power, up to 1Mbps, True RS-232 Transceiver Using Four 0.1µF External Capacitor"
U23: "500mA, Very Low Drop (0.45V) Voltage Regulator"
U24: library part REG1117-2.85, "800mA and 1A Low Dropout Positive Regulator 2.85V, 3.3V, 5V, and Adjustable"
U50: "USB UART Asynchronous Serial Data Transfer Chip, QFN32, Pb-Free"
Y1 Y2 Y3: library part ECS-10-13-1, "Crystal Oscillator"

## Free pads (board coordinates)
  round 1.524 hole 2: 0(108.375,76.8) 1(36.575,98.375) 2(82.275,148.975) 3(50.6,147.675)

## Via types
v1: diameter 0.8, hole 0.4, Top Layer to Bottom Layer, 277 vias
v2: diameter 0.66, hole 0.33, Top Layer to Bottom Layer, tented top, 9 vias

## Nets (pads, with @x,y where several pads share a name; then routed paths per layer and width w, separated by ;. In a path a pad name is that pad's centre, name@x,y a point inside that pad or via, vN(x,y) a via of type N, cw(c..) or ccw(c..) an arc to the next point about the centre after c; other vN are vias at no path point)
1V8: C13.2 C14.2 C15.2 C16.2 C17.2 C18.2 C26.1 C27.1 C47.1 C93.1 J9.3 R2.2 U1.38 U1.47 U1.77 U1.147 U1.148 U1.155 U1.174 U1.203 U24.2 U24.4 | length 215.1
  Top Layer w0.254: U1.47@53.911,103.046 57.087,103.046 v1(57.728,102.405) ; U1.38@53.911,107.546 53.934,107.569 56.269,107.569 v1@56.4,107.7 ; v1(57.75,130.45) 57.75,130.5 57.8,130.55 57.95,130.55 58.711,129.789 U1.203@58.711,128.346 58.711,126.213 v1(59.182,125.742) ; 68.188,96.663 68.188,98.223 U1.77@68.211,98.246 68.199,98.258 68.199,100.29 69.662,101.753 69.662,104.086 v1(69.596,104.152) ; U1.174@73.211,128.346 73.211,131.436 v1(73.375,131.6) ; v1(77.724,116.598) v1@77.749,116.623 ; v1(79.154,124.981) 79.154,125.206 79.509,125.561 83.996,125.561 U1.155@84.011,125.546 ; U24.2@80.315,83.34 80.315,83.378 U24.2@80.315,83.784 ; v1@80.601,121.551 82.804,121.551 ; 85.075,121.775 85.05,121.8 84.011,121.8 83.765,121.8 ; 83.765,121.8 U1.148@84.011,122.046 81.021,122.046 v1(80.775,121.8) 80.85,121.8 83.765,121.8
  Top Layer w0.35: v1@56.4,107.7 57.523,107.7 v1(58.039,108.216) ; v1(64.825,95.45) 66.975,95.45 68.188,96.663 ; v1(70.083,107.058) 73.45,110.425 73.45,112.545 77.503,116.598 v1(77.724,116.598) ; v1@77.749,116.623 77.749,118.699 v1@80.601,121.551
  Top Layer w0.5: R2.2@55.9,92.7 55.9,92.823 55.525,93.198 55.525,94.252 56.123,94.85 v1@56.275,94.85 ; R2.2@56,92.35 56,91.6 57.5,90.1 63.336,90.1 J9.3@65.294,88.142 ; v1@75.625,86.275 77.418,86.275 U24.2@80.315,83.378 ; C47.1@80.264,78.982 80.53,79.248 81.348,79.248 82.5,80.4 82.5,81.799 U24.2@80.618,83.681 ; 82.674,81.6 84.525,81.6 U24.4@86.684,83.759
  Bottom Layer w0.254: C93.1@50.8,123.202 51.448,123.202 52.025,122.625 56.275,122.625 56.865,123.215 56.865,126.34 57.75,127.225 v1(57.75,130.45) ; v1@56.4,107.553 56.4,107.7 v1(56.45,107.65) ; v1(57.728,102.405) v1@57.777,102.454 ; v1(58.039,108.216) 58.105,108.216 v1@58.275,108.046 ; 58.475,109.525 58.72,109.77 ; 58.475,113.913 58.474,113.914 ; C18.2@59.502,122.821 59.34,122.983 59.182,123.141 59.307,123.141 C18.2@59.516,123.141 ; C14.2@59.527,109.77 C14.2@59.944,110.187 ; C15.2@69.53,104.025 69.596,104.091 v1(69.596,104.152) ; 71.694,124.394 71.8,124.5 ; v1(77.724,116.598) C16.2@77.724,116.659 ; C13.2@77.724,120.723 79.548,120.723 v1@80.855,122.03 ; v1@79.15,124.977 v1(79.154,124.981)
  Bottom Layer w0.35: v1(56.275,95.025) 55.625,95.025 54.55,96.1 54.55,97.029 57.803,100.282 v1@57.803,102.163 ; v1@56.4,107.553 57.777,106.176 v1@57.777,102.454 ; v1@58.015,108.24 58.475,108.7 58.475,109.525 58.475,113.913 ; 58.474,113.914 58.474,121.793 C18.2@59.502,122.821 ; 58.72,109.77 C14.2@59.527,109.77 ; v1(59.182,125.742) 59.182,123.425 59.307,123.141 59.365,123.008 C18.2@59.34,122.983 ; C18.2@59.516,123.141 60.875,124.5 68.375,124.5 ; C15.2@69.53,104.025 69.53,104.152 69.53,106.505 v1(70.083,107.058) ; C17.2@71.694,122.821 71.694,124.394 ; v1(73.375,131.6) 68.375,126.6 68.375,124.5 ; v1@73.406,131.6 73.406,135.406 v1(73.575,135.575) 74.61,136.61 v1(74.61,138.684) ; v1@79.15,124.977 78.673,124.5 71.8,124.5 68.375,124.5 ; v1@79.15,124.981 79.15,124.424 80.855,122.719 v1@80.855,122.03
  Bottom Layer w0.5: v1(64.825,95.45) 64.825,88.673 65.325,88.173 J9.3@65.114,87.961 ; J9.3@65.294,88.142 67.111,86.325 71.775,86.325 ; 71.824,86.376 71.875,86.325 v1@75.55,86.325
  other v1: 75.625,86.375